# Altium PCB PCB1.PcbDoc
Units mm, origin at the board's own origin, x right, y up, seen from the top; angles counter-clockwise.
Board outline 38 x 35 mm, 2 copper layers (Top Layer, Bottom Layer); 5 components, 5 nets, 33 pads, 0 vias.
Unrouted connection lines stored in the file: 1.
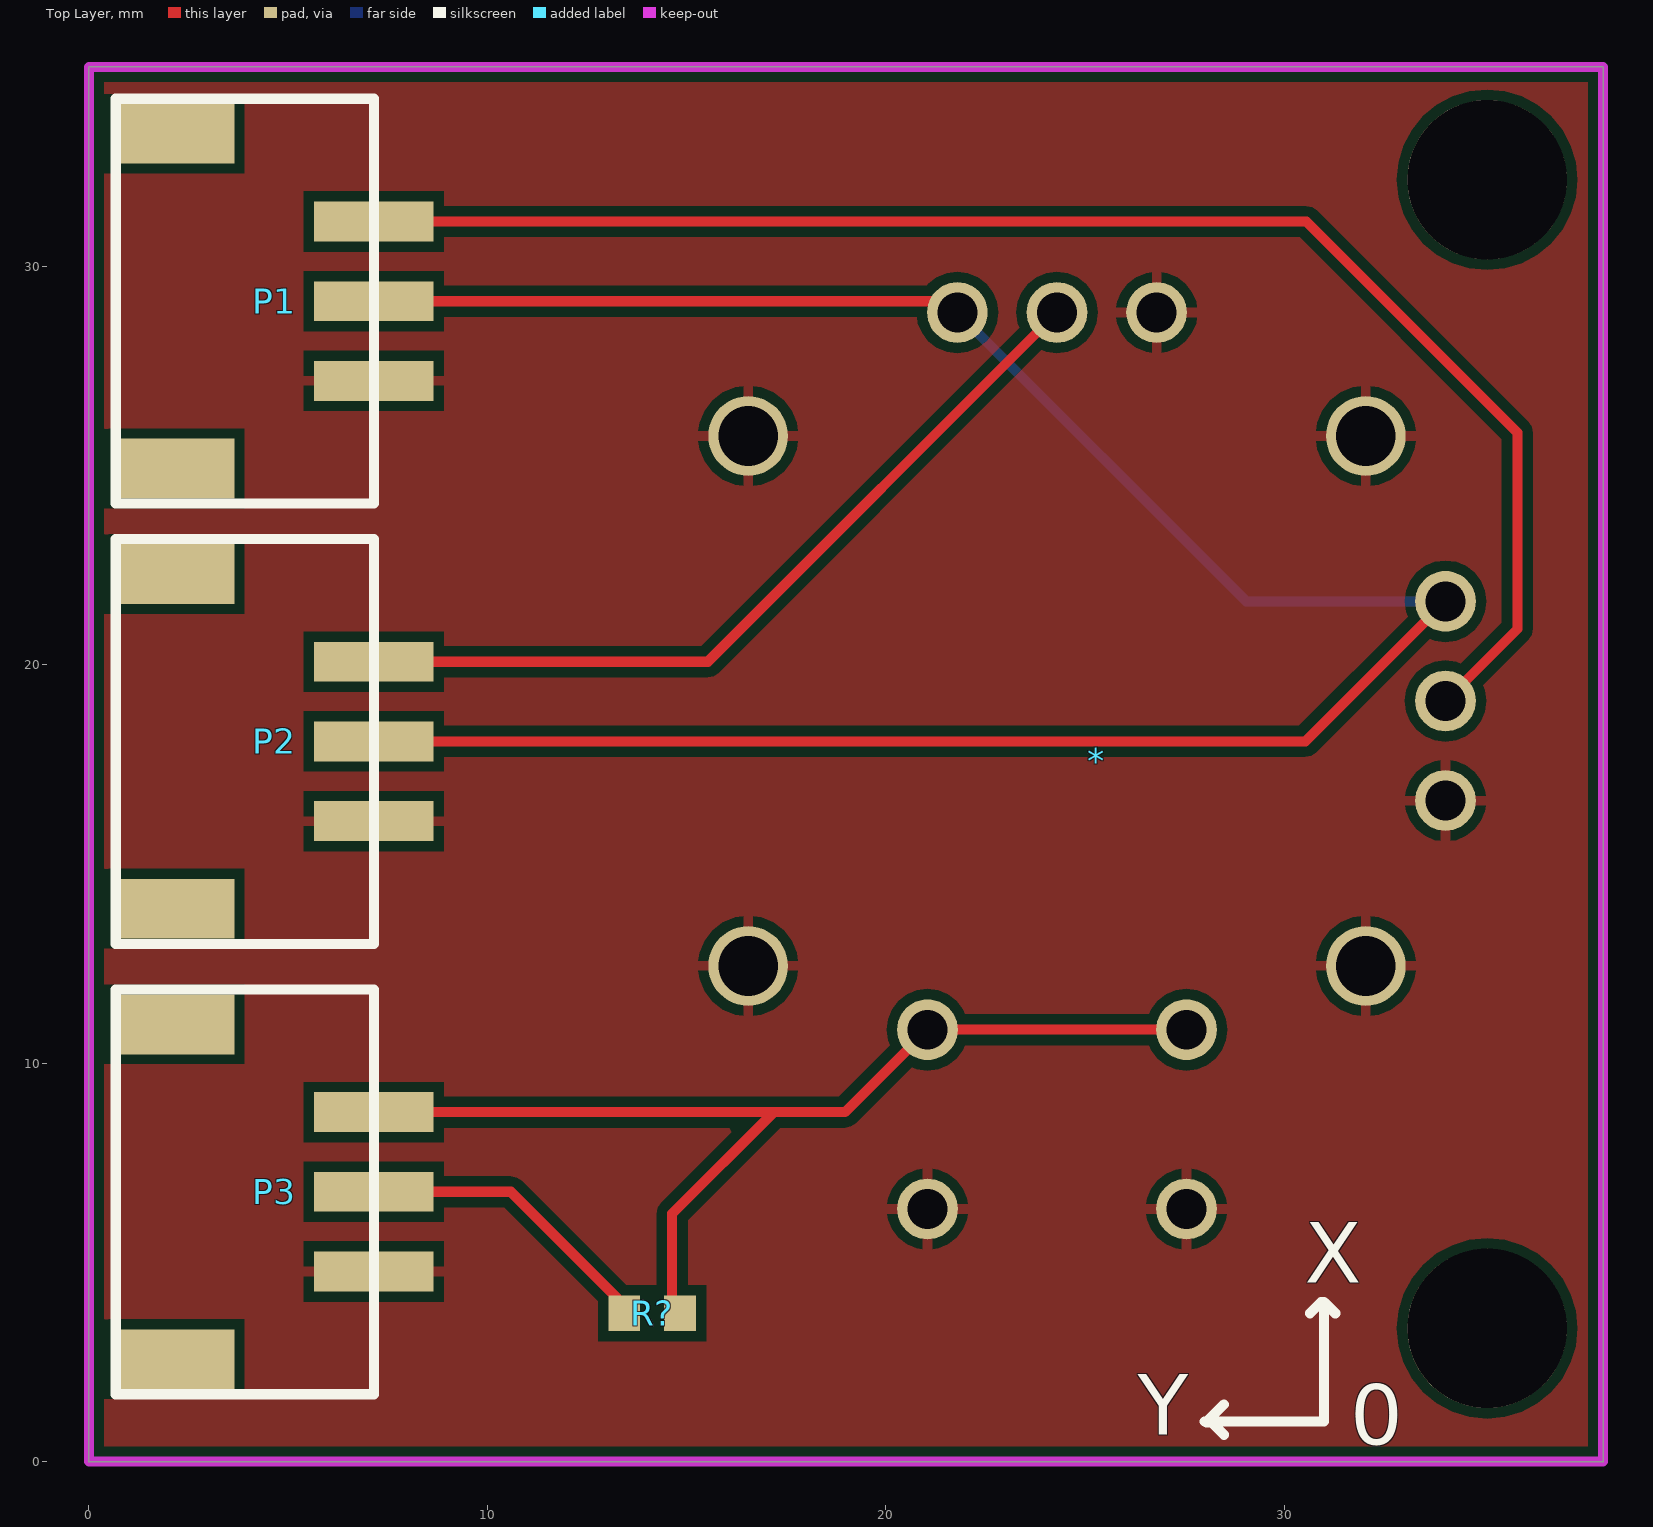
[diagram p0: Top Layer view]
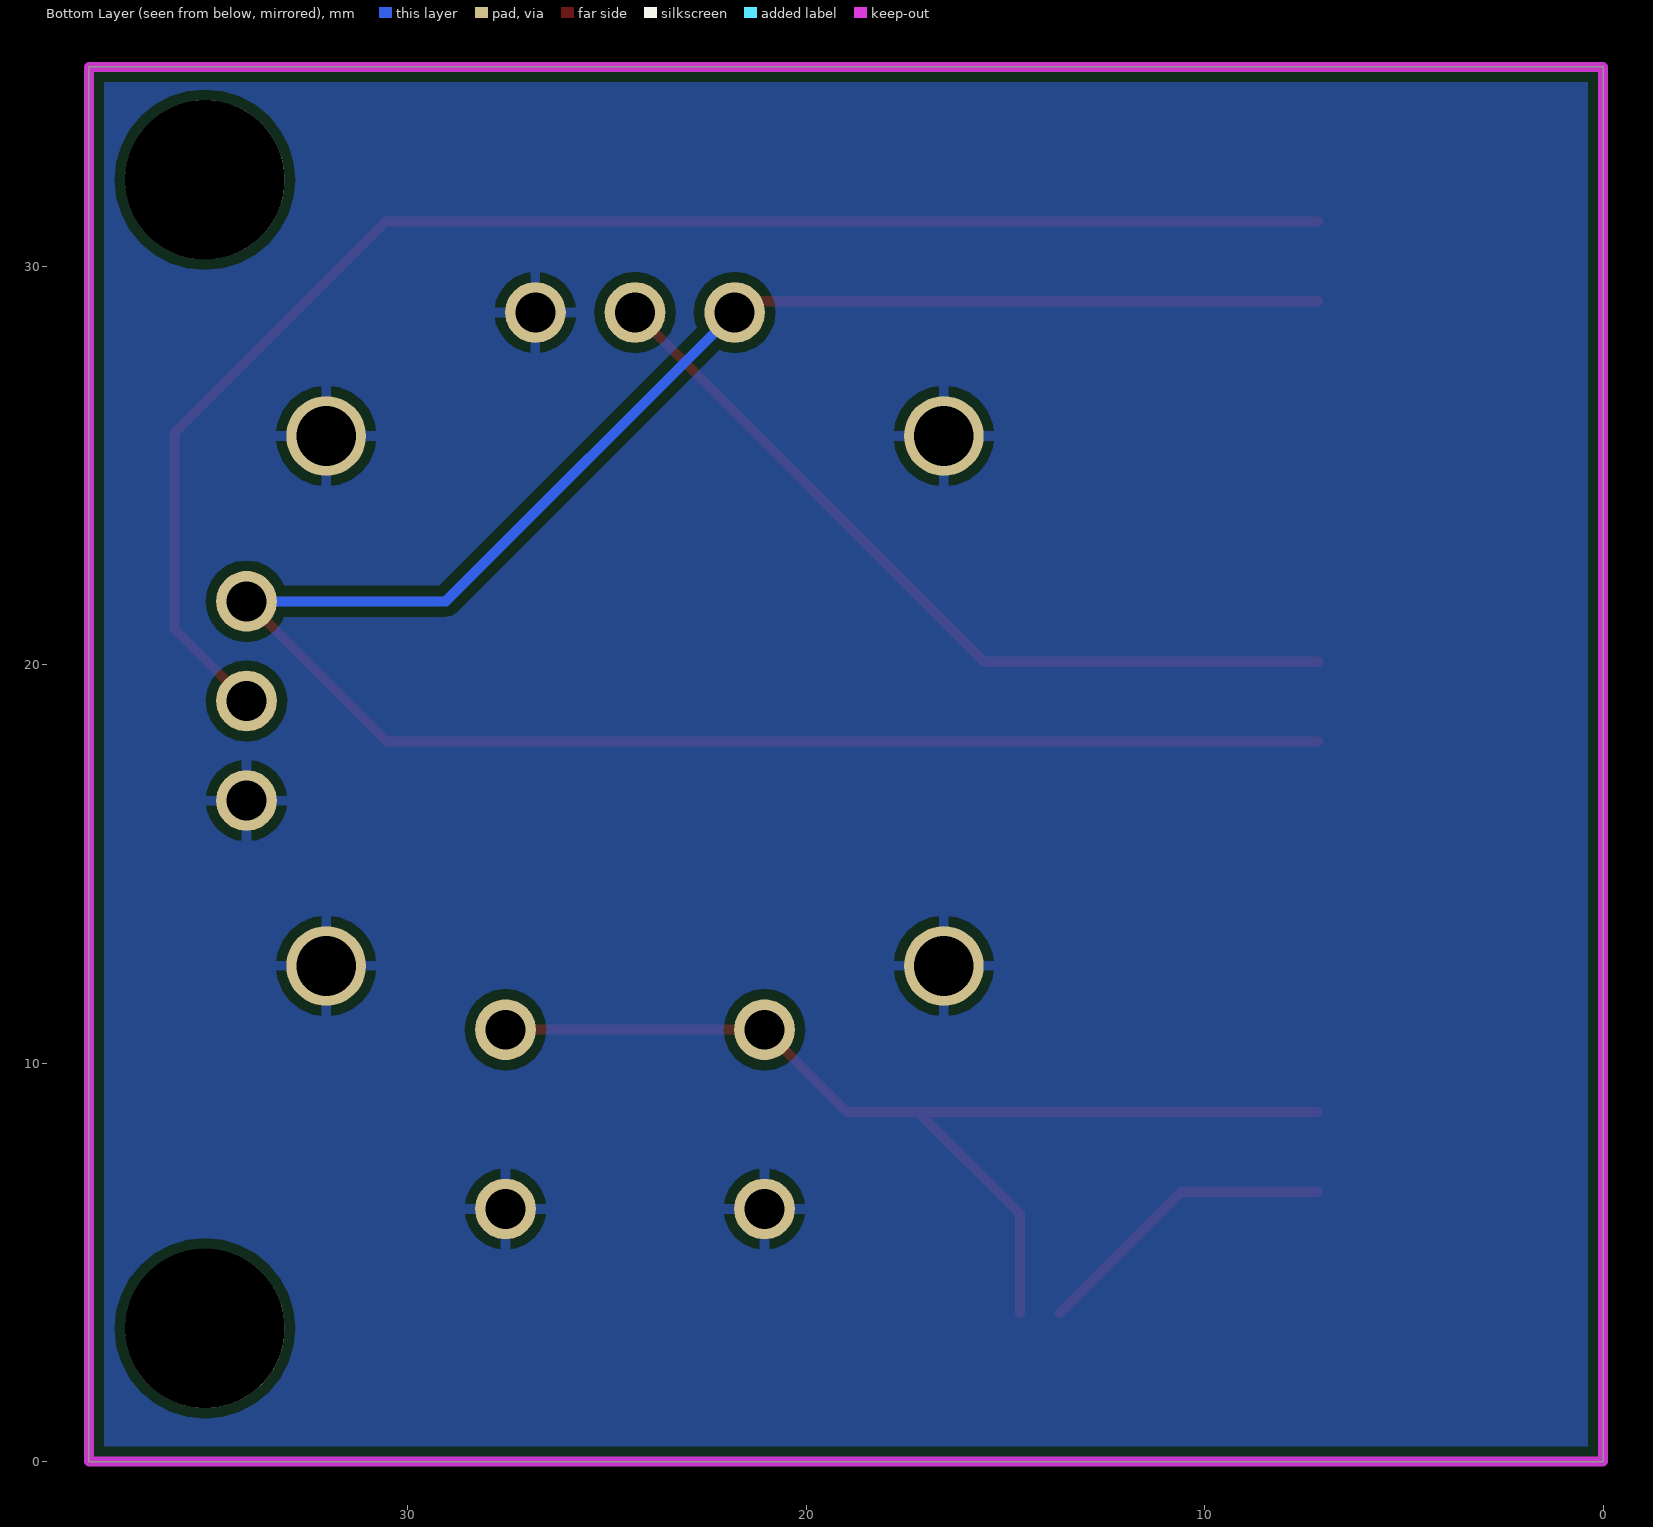
[diagram p1: Bottom Layer view, seen from below]

## Layer stack, top to bottom
Top Layer: signal copper 0.0356
Dielectric: dielectric 0.32, FR-4, Dk 4.8
Bottom Layer: signal copper 0.0356

## Board outline
0,35 38,35 38,0 0,0

## Design rules (kind name [scope] priority, off if disabled: settings)
Clearance [All] p1: gap=0.254
PolygonConnect [All] p1: connectstyle=Relief reliefconductorwidth=0.254 reliefentries=4 polygonreliefangle="90 Angle"
RoutingVias [All] p1: holewidth=0.711 width=1.27 viastyle="Through Hole" minholewidth=0.711 minwidth=1.27 maxholewidth=0.711 maxwidth=1.27
SilkscreenOverComponentPads [All] p1: minsilkscreentomaskgap=0.254
SolderMaskExpansion [All] p1: expansion=0.102
Width [All] p1: maxlimit=0.254 minlimit=0.254 preferedwidth=0.254
27 further rules are at their usual default settings.

## Components (designator, comment, footprint, x,y, rotation, side; value= is the part's Value field where it differs from the comment)
* "Component_1" yaogan 24.295,19.088 r0 top
P1 "Header 3" sh-2.0 7.15,29.121 r270 top
P2 "Header 3" sh-2.0 7.15,18.072 r270 top
P3 "Header 3" sh-2.0 7.15,6.769 r270 top
R? "Res3" 1608[0603] 14.135,3.721 r0 top

## Footprints (in the part's own frame and the unit in brackets; to place one, negate y for a bottom-side part, rotate by r counter-clockwise, add the part's x,y. Pads: shape width x height; smd on the part's side, far side on the other; paste and mask are expansions set on the pad)
1608[0603] [mm] "Chip Capacitor, Body 1.6x0.8mm, IPC High Density"
  rect 0.8x0.9 smd: 1(-0.7,0) 2(0.7,0)
  body extent -0.87,-0.48 0.87,0.48, height 1.3
sh-2.0 [mm]
  rect 1x3 smd: 1(-2,0) 2(0,0) 3(2,0)
  rect 1.5x3 smd: GND(-4.2,-5) GND(4.2,-5)
  silkscreen extent -5.08,-6.48 5.08,0
yaogan [mm]
  round 2 hole 1.5: 1(-7.75,-6.65) 2(-7.75,6.65) 3(7.75,6.65) 4(7.75,-6.65)
  round 1.524 hole 1: 5(-3.25,-12.75) 6(3.25,-12.75) 7(2.5,9.75) 8(0,9.75) 9(-2.5,9.75) 10(9.75,-2.5) 11(9.75,0) 12(9.75,2.5) 13(-3.25,-8.25) 14(3.25,-8.25)

## Part data
*: library part Compo
P1 P2 P3: "Header,"
R?: "Resistor"

## Free pads (board coordinates)
  round 4 hole 4: 0(35.09,3.34) 0(35.09,32.169)

## Nets (pads, with @x,y where several pads share a name; then routed paths per layer and width w, separated by ;. In a path a pad name is that pad's centre, name@x,y a point inside that pad or via, vN(x,y) a via of type N, cw(c..) or ccw(c..) an arc to the next point about the centre after c; other vN are vias at no path point)
GND: *.1 *.2 *.3 *.4 *.5 *.6 *.7 *.10 P1.3 P2.3 P3.3
VCC: *.9 *.12 P1.2 P2.2 P3.2 R?.1 | length 66.1
  Top Layer w0.254: P3.2 10.587,6.769 R?.1@13.635,3.721 ; P2.2 30.529,18.072 *.12 ; P1.2 21.512,29.121 *.9
  Bottom Layer w0.254: *.9 29.045,21.588 *.12
X: *.11 P1.1 | length 38.4
  Top Layer w0.254: P1.1 30.55,31.121 35.852,25.819 35.852,20.895 *.11
Y: *.8 P2.1 | length 20.8
  Top Layer w0.254: P2.1 15.529,20.072 *.8
Z: *.13 *.14 P3.1 R?.2 | length 27.4
  Top Layer w0.254: P3.1 17.183,8.769 ; R?.2@14.635,3.721 14.635,6.221 17.183,8.769 ; *.14 *.13 18.976,8.769 17.183,8.769
pads on no net: P1.GND P2.GND P3.GND

## Polygon pours and split planes (outlines as drawn)
GND on Top Layer "Top Layer-No Net" (solid, pour order 8): -0.216,35.217 38.265,35.217 38.265,-0.089 38.138,-0.216 38.011,-0.343 -0.216,-0.343
GND on Bottom Layer "Top Layer-No Net" (solid, pour order 10): -0.216,35.217 38.138,35.217 38.265,35.09 38.265,-0.216 -0.216,-0.216

## Keep-outs
Keep-Out Layer:
  the board outline again, w0.254

## Silkscreen, mask and mechanical layers (free items; w line width, h text height)
Top Overlay:
  lines w0.254: 28.159,1 28.051,1 ; 28.486,0.673 28.178,0.981 28.051,0.981 28.051,1 ; 28.486,1.435 28.051,1 ; 30.645,3.721 30.924,4 31,4 ; 31.28,3.721 31.001,4 ; 28,1 31,1 31,4 ; 28,1 28.051,1 ; 28,1 28.051,1 ; 31,4 31.001,4
  text "X" at 30.518,4.483 h1.52
  text "Y" at 26.327,0.673 h1.52
  text "0" at 31.661,0.419 h1.52
Top Solder:
  text "JoyStick Module V2" at 9.271,32.639 h1.2